# Altium PCB IR_Communication.PcbDoc
Units mil, origin at the board's own origin, x right, y up, seen from the top; angles counter-clockwise.
Board outline 4250 x 3275 mil, 2 copper layers (Top Layer, Bottom Layer); 58 components, 46 nets, 191 pads, 21 vias.
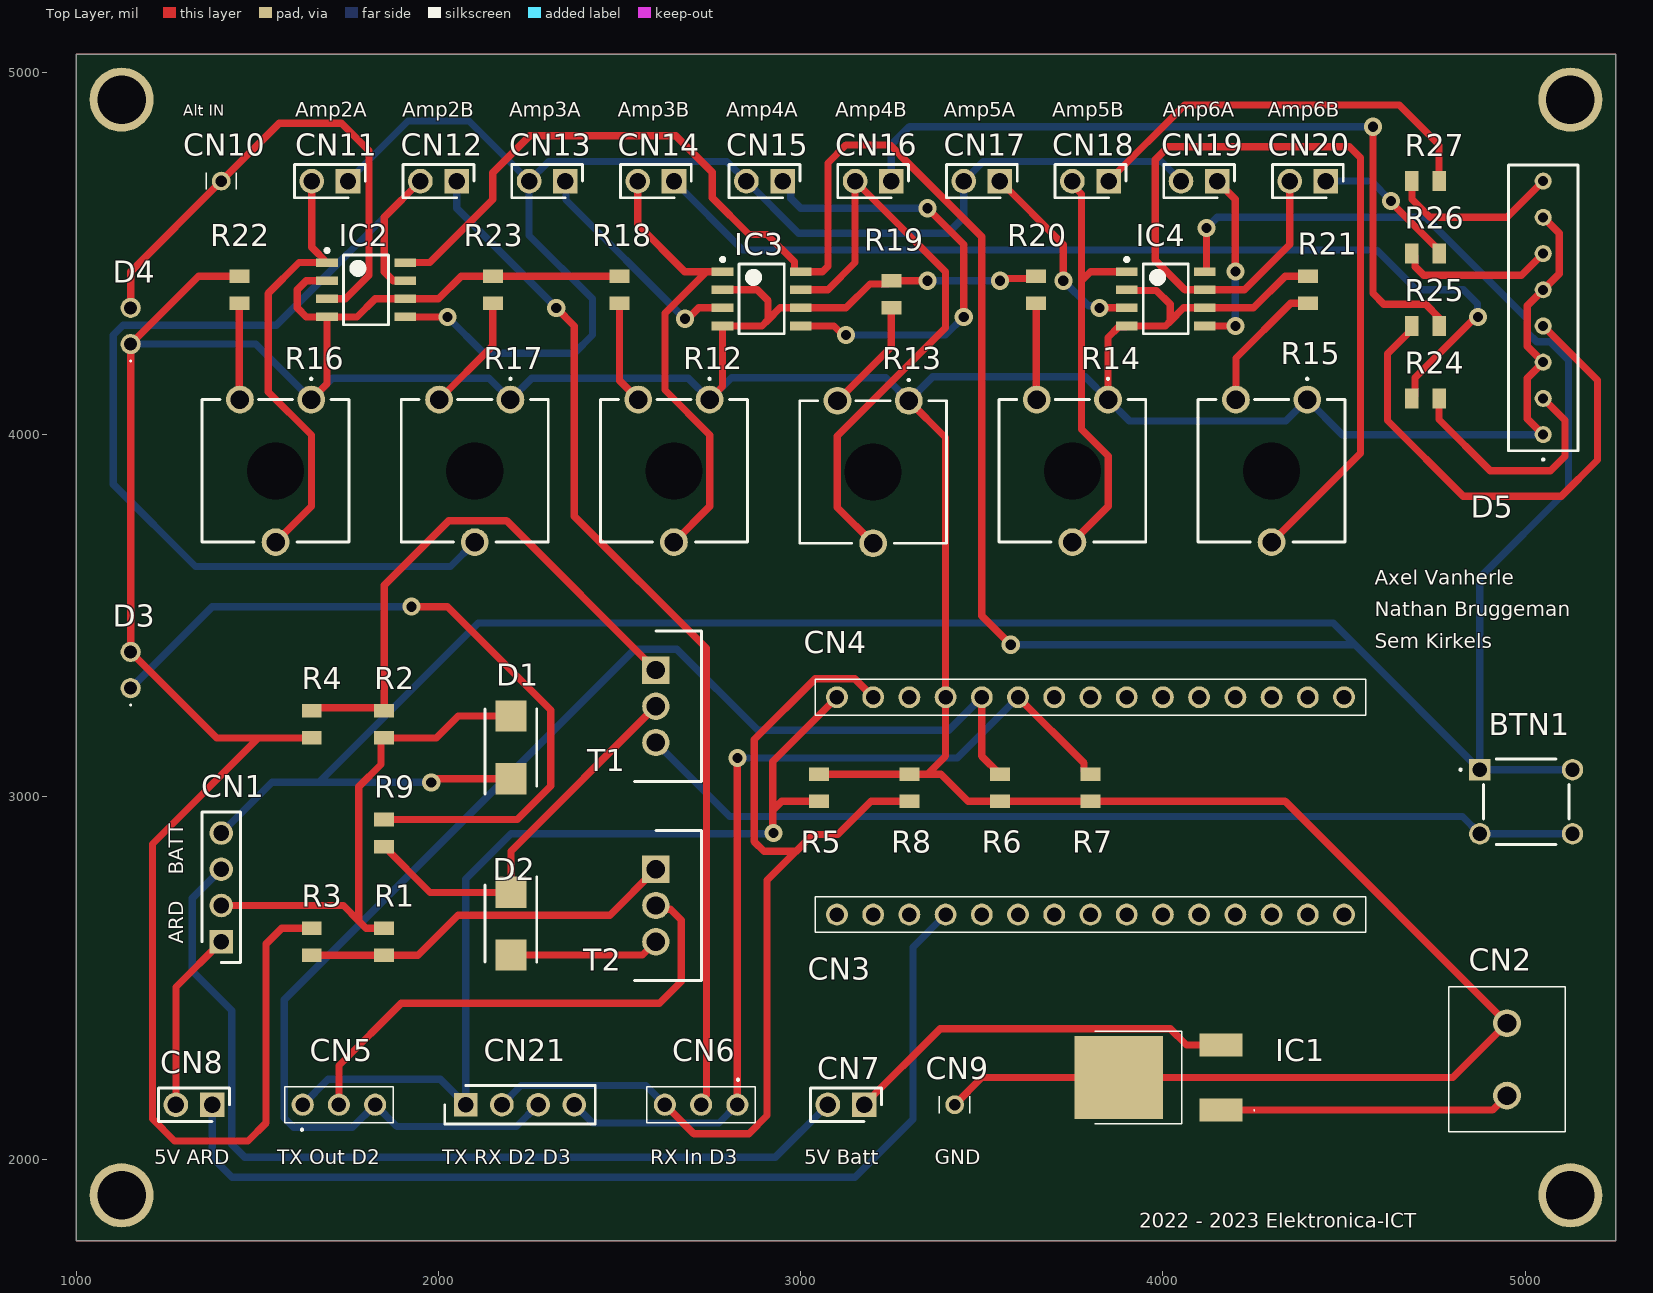
[diagram p0: Top Layer view]
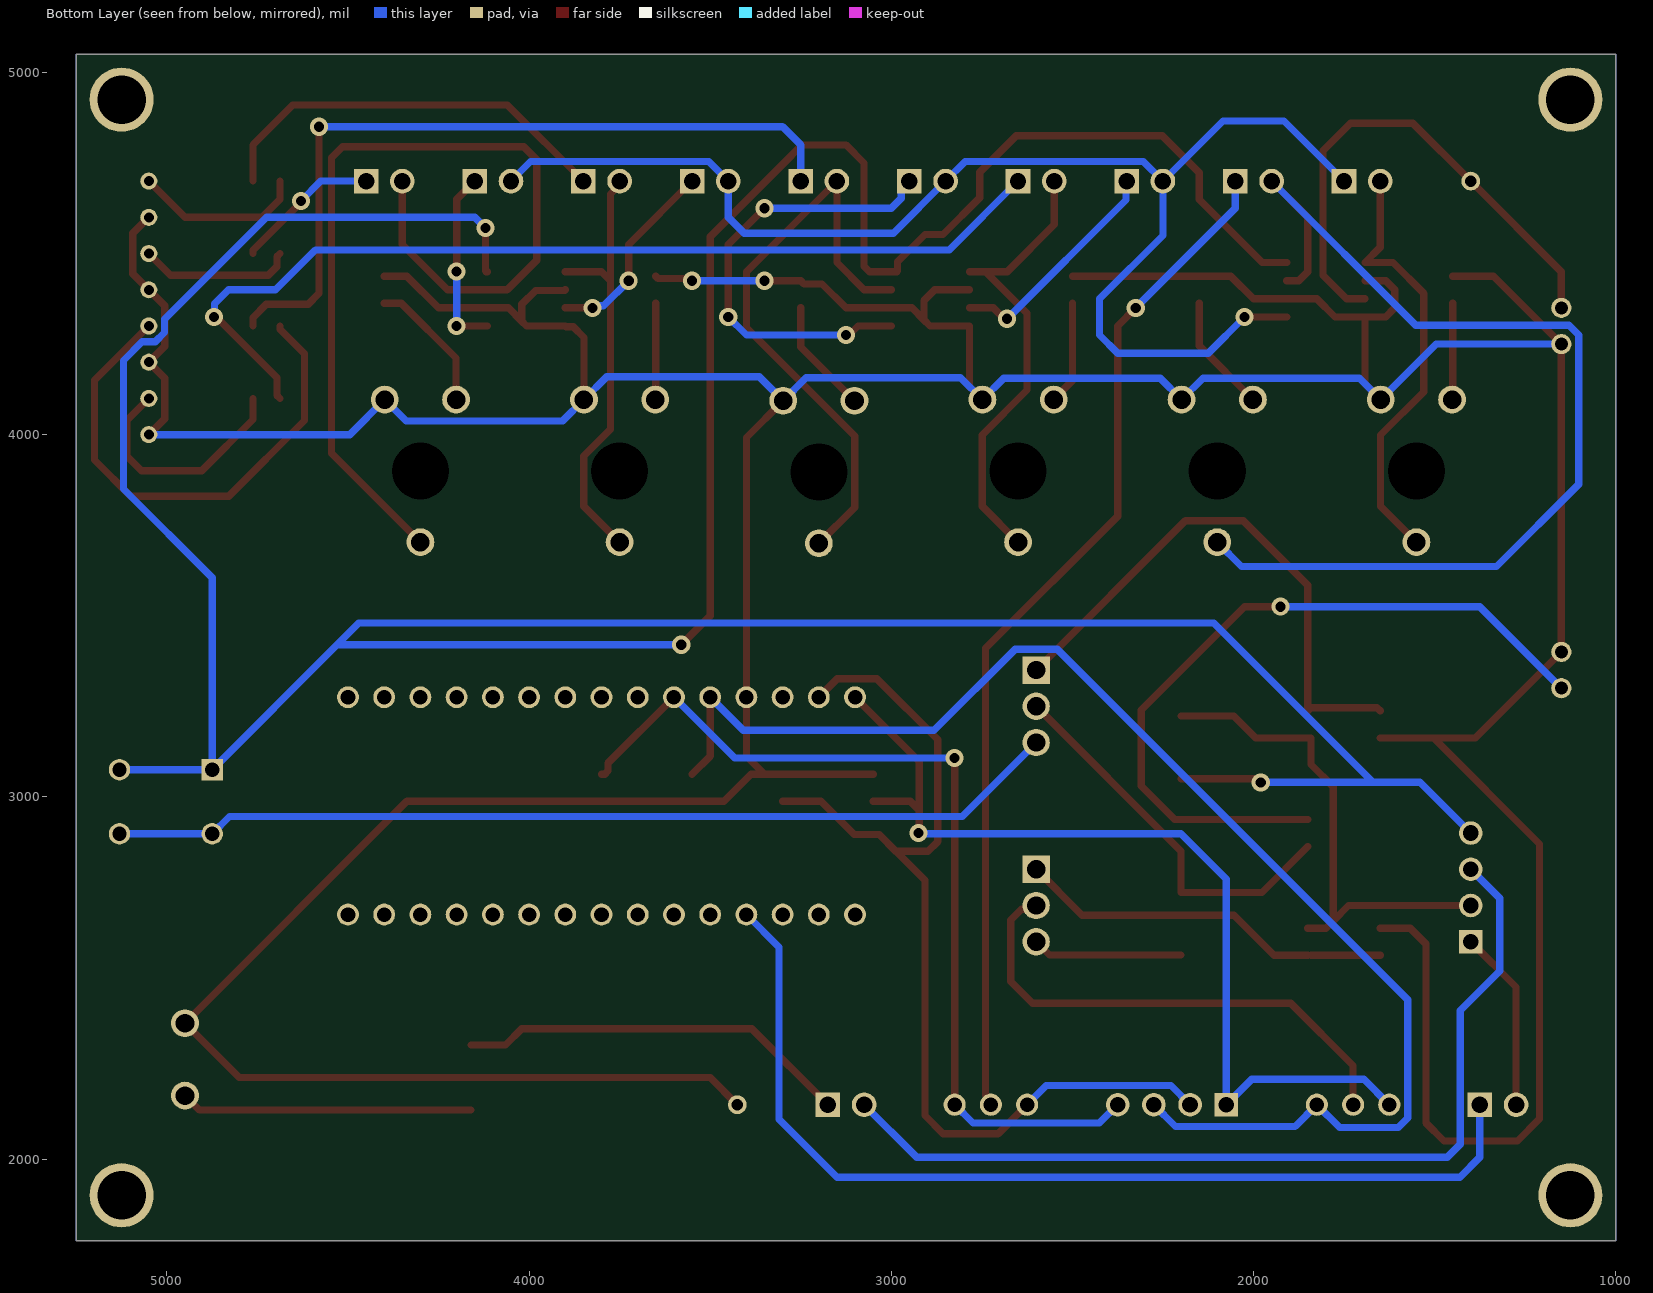
[diagram p1: Bottom Layer view, seen from below]
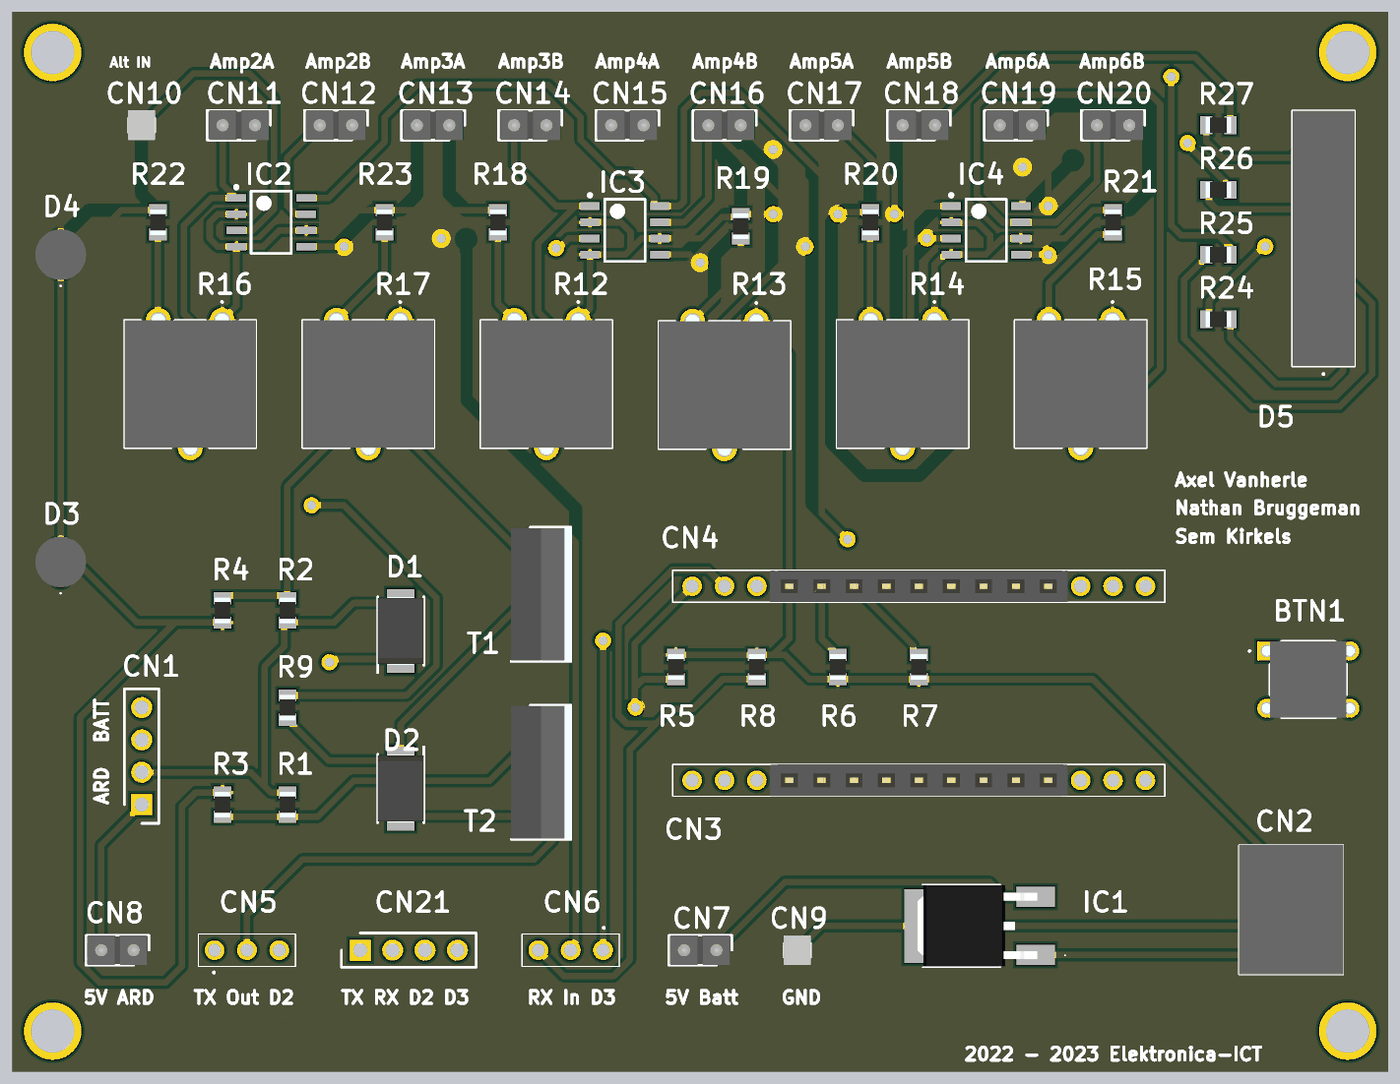
[diagram p2: 3D render of the assembled board from above, using the file's embedded part models]

## Layer stack, top to bottom
Top Solder: solder mask 0.4, Solder Resist, Dk 3.5
Top Layer: signal copper 1.4
Dielectric 1: dielectric 12.6, FR-4, Dk 4.8
Bottom Layer: signal copper 1.4
Bottom Solder: solder mask 0.4, Solder Resist, Dk 3.5

## Board outline
1000,1775 5250,1775 5250,5050 1000,5050

## Design rules (kind name [scope] priority, off if disabled: settings)
Clearance [All] p1: gap=10 ignorepadtopadclearanceinfootprint=FALSE except(0: Arc-Hole Track-Hole SMDPad-Hole THPad-Hole Via-Hole Fill-Hole Poly-Hole Region-Hole Text-Hole)
PolygonConnect [All] p1: connectstyle=Relief reliefconductorwidth=10 reliefentries=4 polygonreliefangle="90 Angle" airgapwidth=10
RoutingVias [All] p1: holewidth=28 width=50 viastyle="Through Hole" minholewidth=28 minwidth=50 maxholewidth=28 maxwidth=50
SolderMaskExpansion [All] p1: expansion=4 istentingtop=FALSE
Width [All] p1: maxlimit=30 minlimit=20 preferedwidth=20 minimp=50.000000 maximp=50.000000 favimp=50.000000
30 further rules are at their usual default settings.

## Classes and differential pairs
component class Pre_Amplifier: CN10 CN11 CN12 D4 IC2 R16 R17 R22 R23
component class Indicators: D5 R24 R25 R26 R27
component class Amplifier: CN13 CN14 CN15 CN16 CN17 CN18 CN19 CN20 IC3 IC4 R12 R13 R14 R15 R18 R19 R20 R21
component class Input_Selection: BTN1 CN1 D1 D2 D3 R1 R2 R3 R4 R9 T1 T2
component class CPU: CN2 CN3 CN4 CN5 CN6 CN7 CN8 CN9 CN21 IC1 R5 R6 R7 R8

## Components (designator, comment, footprint, x,y, rotation, side; value= is the part's Value field where it differs from the comment)
BTN1 "Button" PushButton 4875,3075 r0 top
CN1 "4 Pin Header" "4 PIN HEADER" 1400,2600 r90 top
CN2 "BAT SCREW CON" "BAT SCREW CON" 4950,2175 r90 top
CN3 "Arduino 15PIN" "15 Pin Header" 4500,2675 r180 top
CN4 "Arduino 15PIN" "15 Pin Header" 4500,3275 r180 top
CN5 "Jumper TX Arduino" "3 Pin Header" 1625,2150 r0 top
CN6 "Jumper RX Arduino" "3 Pin Header" 2825,2150 r180 top
CN7 "2 Pin Header" "2 Pin Header" 3175,2150 r180 top
CN8 "2 Pin Header" "2 Pin Header" 1375,2150 r180 top
CN9 "GND REF" "1 PIN HEADER" 3425,2150 r0 top
CN10 "1 Pin Header" "1 PIN HEADER" 1400,4700 r0 top
CN11 "2 Pin Header" "2 Pin Header" 1750,4700 r180 top
CN12 "2 Pin Header" "2 Pin Header" 2050,4700 r180 top
CN13 "2 Pin Header" "2 Pin Header" 2350,4700 r180 top
CN14 "2 Pin Header" "2 Pin Header" 2650,4700 r180 top
CN15 "2 Pin Header" "2 Pin Header" 2950,4700 r180 top
CN16 "2 Pin Header" "2 Pin Header" 3250,4700 r180 top
CN17 "2 Pin Header" "2 Pin Header" 3550,4700 r180 top
CN18 "2 Pin Header" "2 Pin Header" 3850,4700 r180 top
CN19 "2 Pin Header" "2 Pin Header" 4150,4700 r180 top
CN20 "2 Pin Header" "2 Pin Header" 4450,4700 r180 top
CN21 "ARD DATA REF" "4 PIN HEADER" 2075,2150 r0 top
D1 "Shottky Diode" "Zener Diode" 2200,3136.61 r90 top
D2 "Shottky Diode" "Zener Diode" 2200,2650 r270 top
D3 "IR LED" ELIR204H16L10 1150,3300 r90 top
D4 "IR LED" ELIR204H16L10 1150,4250 r90 top
D5 "LED Bar" LED_Bar 5050,4000 r90 top
IC1 "5V Regulator" "5V Regulator" 4000,2225 r0 top
IC2 "NCV833DR2G" "Footprint Opamp" 1800,4400 r0 top
IC3 "NCV833DR2G" "Footprint Opamp" 2892.13,4375 r0 top
IC4 "NCV833DR2G" "Footprint Opamp" 4007.87,4375 r0 top
R1 "1 kOhm" 0805 1850,2600 r270 top
R2 "1 kOhm" 0805 1850,3200 r90 top
R3 "100 kOhm" 0805 1650,2600 r90 top
R4 "100 kOhm" 0805 1650,3200 r270 top
R5 "100k Ohm" 0805 3050,3025 r270 top
R6 "100k Ohm" 0805 3550,3025 r90 top
R7 "100k Ohm" 0805 3800,3025 r270 top
R8 "100k Ohm" 0805 3300,3025 r90 top
R9 "220 Ohm" 0805 1850,2900 r90 top
R12 "PT10LV10-202A2020-S" "Variable resistor" 2748.43,4096.85 r180 top
R13 "PT10LV10-202A2020-S" "Variable resistor" 3298.43,4093.7 r180 top
R14 "PT10LV10-202A2020-S" "Variable resistor" 3848.43,4096.85 r180 top
R15 "PT10LV10-202A2020-S" "Variable resistor" 4398.43,4096.85 r180 top
R16 "PT10LV10-202A2020-S" "Variable resistor" 1648.43,4096.85 r180 top
R17 "PT10LV10-202A2020-S" "Variable resistor" 2198.43,4096.85 r180 top
R18 "1 kOhm" 0805 2500,4400 r90 top
R19 "1 kOhm" 0805 3250,4387.4 r90 top
R20 "1 kOhm" 0805 3650,4400 r90 top
R21 "1 kOhm" 0805 4400,4400 r90 top
R22 "1 kOhm" 0805 1450,4400 r90 top
R23 "1 kOhm" 0805 2150,4400 r90 top
R24 "220 Ohm" 0805 4725,4100 r0 top
R25 "220 Ohm" 0805 4725,4300 r180 top
R26 "220 Ohm" 0805 4725,4500 r180 top
R27 "220 Ohm" 0805 4725,4700 r180 top
T1 "P-Channel MOSFET" TO254P469X1042X1967-3P 2600,3350 r270 top
T2 "N-Channel MOSFET" N-MOS 2600,2800 r270 top

## Footprints (in the part's own frame and the unit in brackets; to place one, negate y for a bottom-side part, rotate by r counter-clockwise, add the part's x,y. Pads: shape width x height; smd on the part's side, far side on the other; paste and mask are expansions set on the pad)
"1 PIN HEADER" [mm]
  round 1.316 hole 0.81: 2(0,0)
  silkscreen extent -1.07,-0.59 1.07,0.59, body extent -1.07,-1.17 1.07,1.17, height 8.2
"2 Pin Header" [mm]
  rect 1.725x1.725 hole 1.15: 1(0,0)
  round 1.725 hole 1.15: 2(2.54,0)
  silkscreen extent -1.21,-1.17 3.75,1.17, body extent -1.06,-1.17 3.6,1.17, height 8.21
"3 Pin Header" [mm] "TSW-103-XX-YY-S"
  round 1.55 hole 1.02: 1(0,0) 2(2.54,0) 3(5.08,0)
  silkscreen extent -1.27,-1.8 6.35,1.27, body extent -2.54,-2.92 7.62,2.54, height 0.25
"4 PIN HEADER" [mm] "HDRV4W64P0X254_1X4_1016X250X863P"
  rect 1.65x1.65 hole 1.1: 1(0,0)
  round 1.65 hole 1.1: 2(2.54,0) 3(5.08,0) 4(7.62,0)
  silkscreen extent -1.47,-1.35 9.09,1.35, body extent -1.78,-1.65 9.27,1.65, height 0.25
"5V Regulator" [mm] "MC7805BDTG"
  rect 3x1.6 smd: 1(4.08,-2.285) 3(4.08,2.285)
  rect 6.2x5.8 smd: 2(-3.1,0)
  silkscreen extent -4.79,-3.25 6.43,3.25, body extent -5.18,-3.17 4.22,3.18, height 2.18
"15 Pin Header" [mm]
  round 1.53 hole 1.02: 1(0,0) 2(2.54,0) 3(5.08,0) 4(7.62,0) 5(10.16,0) 6(12.7,0) 7(15.24,0) 8(17.78,0) 9(20.32,0) 10(22.86,0) 11(25.4,0) 12(27.94,0) 13(30.48,0) 14(33.02,0) 15(35.56,0)
  silkscreen extent -1.52,-1.25 37.08,1.25, body extent 6.1,-1.25 29.46,1.25, height 9.61
0805 [mm]
  rect 0.95x1.4 smd: 1(-0.95,0) 2(0.95,0)
  body extent -1,-0.63 1,0.63, height 0.6
"BAT SCREW CON" [mm]
  round 1.95 hole 1.3: 1(0,0) 2(5.08,0)
  silkscreen extent -2.54,-4.1 7.62,4.1, body extent -2.54,-4.1 7.62,4.1, height 10.5
ELIR204H16L10 [mm]
  round 1.416 hole 0.91: 1(0,0) 2(2.54,0)
  silkscreen extent -1.23,-0.05 -1.13,0.05, body extent -0.73,-1.99 3.27,1.99, height 7.1
"Footprint Opamp" [mm] "ONSC-SOIC-8-751-07_V"
  rect 1.52x0.6 smd: 1(-2.74,1.905) 2(-2.74,0.635) 3(-2.74,-0.635) 4(-2.74,-1.905) 5(2.74,-1.905) 6(2.74,-0.635) 7(2.74,0.635) 8(2.74,1.905)
  silkscreen extent -2.86,-2.45 1.58,2.88, body extent -1.95,-2.45 1.95,2.45, height 1.75
LED_Bar [mm] "SSBLX2550SGW"
  round 1.2 hole 0.7: 1(0,0) 2(2.54,0) 3(5.08,0) 4(7.62,0) 5(10.16,0) 6(12.7,0) 7(15.24,0) 8(17.78,0)
  silkscreen extent -1.8,-2.43 18.91,2.43, body extent -1.13,-2.43 18.91,2.43, height 7.47
N-MOS [mm] "TO254P469X1042X1967-3P"
  rect 1.92x1.92 hole 1.28: 1(0,0)
  round 1.92 hole 1.28: 2(2.54,0) 3(5.08,0)
  silkscreen extent -2.73,-1.49 7.81,3.2, body extent -2.67,-1.5 7.75,3.19, height 18.84
PushButton [mm] "TS026650BK100SCRD"
  rect 1.5x1.5 hole 1: 1(0,0)
  round 1.5 hole 1: 2(6.5,0) 3(0,-4.5) 4(6.5,-4.5)
  silkscreen extent -1.4,-5.25 6.25,0.75, body extent -0.4,-5.25 6.9,0.75, height 5.3
TO254P469X1042X1967-3P [mm]
  rect 1.92x1.92 hole 1.28: 1(0,0)
  round 1.92 hole 1.28: 2(2.54,0) 3(5.08,0)
  silkscreen extent -2.73,-1.49 7.81,3.2, body extent -2.67,-1.5 7.75,3.19, height 18.84
"Variable resistor" [mm] "PT10LV10202A2020S"
  round 1.95 hole 1.3: A1(0,0) E1(5,0) S1(2.5,10)
  round 2 hole 4 unplated: MH1(2.5,5)
  silkscreen extent -2.65,-1.5 7.65,10, body extent -2.65,-0.55 7.65,10.55, height 6.3
"Zener Diode" [mm] "DIOM5436X244N"
  rect 2.2x2.15 smd: 1(-2.2,0) 2(2.2,0)
  silkscreen extent -3.27,-1.81 2.7,1.81, body extent -2.7,-1.81 2.7,1.81, height 2.44

## Part data
BTN1: "TS02-66-50-BK-100-SCR-D", Manufacturer_Name="CUI Devices", Mouser Part Number=179-TS026650BK100SCR, Arrow Part Number=TS02-66-50-BK-100-SCR-D, Arrow Price/Stock=https://www.arrow.com/en/products/ts02-66-50-bk-100-scr-d/cui-devices?region=nac, Datasheet Link=https://www.cuidevices.com/product/resource/ts02.pdf, Height=5.2mm, Manufacturer_Part_Number=TS02-66-50-BK-100-SCR-D, Mouser Price/Stock=https://www.mouser.co.uk/ProductDetail/CUI-Devices/TS02-66-50-BK-100-SCR-D?qs=A6eO%252BMLsxmQON%252BZSzpek2A%3D%3D
CN1: "G800LW304032EU", Manufacturer_Name="Amphenol Communications Solutions", Mouser Part Number=523-G800LW304032EU, Datasheet Link=https://cdn.amphenol-cs.com/media/wysiwyg/files/drawing/g800lwxxxxxxeu.pdf, Height=8.63mm, Manufacturer_Part_Number=G800LW304032EU, Mouser Price/Stock=https://www.mouser.com/Search/Refine.aspx?Keyword=523-G800LW304032EU
CN2: "Connector", Arrow Part Number=TB006-508-02BE, Manufacturer_Name="CUI Devices", Mouser Part Number=490-TB006-508-02BE, Arrow Price/Stock=https://www.arrow.com/en/products/tb006-508-02be/cui-devices?region=nac, Datasheet Link=https://datasheet.datasheetarchive.com/originals/distributors/Datasheets_SAMA/b266c411a02422edb513b788238f8420.pdf, Height=10.4mm, Manufacturer_Part_Number=TB006-508-02BE, Mouser Price/Stock=https://www.mouser.co.uk/ProductDetail/CUI-Devices/TB006-508-02BE?qs=vLWxofP3U2wEdOVV%2FaT04w%3D%3D
CN3 CN4: library part "15 Pin Header", "15 Pin Header Connector", Arrow Part Number=PRT-16279, Manufacturer_Name=SparkFun, Mouser Part Number=474-PRT-16279, Arrow Price/Stock=https://www.arrow.com/en/products/prt-16279/sparkfun-electronics?region=nac, Datasheet Link=https://cdn.sparkfun.com/assets/8/d/8/4/7/DS-16279-Arduino_Nano_Stackable_Header_Kit.pdf, Height=8.65mm, Manufacturer_Part_Number=PRT-16279, Mouser Price/Stock=https://www.mouser.co.uk/ProductDetail/SparkFun/PRT-16279?qs=vmHwEFxEFR8I6W1vfufYPg%3D%3D
CN5 CN6: library part "3 Pin Header", "TSW-103-07-G-S", Manufacturer_Name=SAMTEC, Mouser Part Number=200-TSW10307GS, Arrow Part Number=TSW-103-07-G-S, Arrow Price/Stock=https://www.arrow.com/en/products/tsw-103-07-g-s/samtec?region=europe, Datasheet Link=http://suddendocs.samtec.com/prints/tsw-xxx-xx-xxx-x-xx-xxx-mkt.pdf, Manufacturer_Part_Number=TSW-103-07-G-S, Mouser Price/Stock=https://www.mouser.co.uk/ProductDetail/Samtec/TSW-103-07-G-S?qs=iT52DjcXudtntd1jApTIAw%3D%3D
CN7 CN8 CN11 CN12 CN13 CN14 CN15 CN16 CN17 CN18 CN19 CN20: "Connector", Arrow Part Number=5-146284-2, Manufacturer_Name="TE Connectivity", Mouser Part Number=571-5-146284-2, Arrow Price/Stock=https://www.arrow.com/en/products/5-146284-2/te-connectivity, Datasheet Link=https://componentsearchengine.com/Datasheets/1/5-146284-2.pdf, Height=8.21mm, Manufacturer_Part_Number=5-146284-2, Mouser Price/Stock=https://www.mouser.co.uk/ProductDetail/TE-Connectivity/5-146284-2?qs=26tC0AmtfJgTF4M3cEQgiA%3D%3D
CN9: library part "1 Pin Header", "Connector", Arrow Part Number=5-146281-1, Manufacturer_Name="TE Connectivity", Mouser Part Number=571-5-146281-1, Arrow Price/Stock=https://www.arrow.com/en/products/5-146281-1/te-connectivity, Datasheet Link=https://www.mouser.com/datasheet/2/418/NG_CD_146281_G1-1238634.pdf, Height=8.81mm, Manufacturer_Part_Number=5-146281-1, Mouser Price/Stock=https://www.mouser.co.uk/ProductDetail/TE-Connectivity/5-146281-1?qs=bwpFY26eRVdQbbdvDiYEig%3D%3D
CN10: "Connector", Arrow Part Number=5-146281-1, Manufacturer_Name="TE Connectivity", Mouser Part Number=571-5-146281-1, Arrow Price/Stock=https://www.arrow.com/en/products/5-146281-1/te-connectivity, Datasheet Link=https://www.mouser.com/datasheet/2/418/NG_CD_146281_G1-1238634.pdf, Height=8.81mm, Manufacturer_Part_Number=5-146281-1, Mouser Price/Stock=https://www.mouser.co.uk/ProductDetail/TE-Connectivity/5-146281-1?qs=bwpFY26eRVdQbbdvDiYEig%3D%3D
CN21: library part "4 Pin Header", "G800LW304032EU", Manufacturer_Name="Amphenol Communications Solutions", Mouser Part Number=523-G800LW304032EU, Datasheet Link=https://cdn.amphenol-cs.com/media/wysiwyg/files/drawing/g800lwxxxxxxeu.pdf, Height=8.63mm, Manufacturer_Part_Number=G800LW304032EU, Mouser Price/Stock=https://www.mouser.com/Search/Refine.aspx?Keyword=523-G800LW304032EU
D1 D2: library part "Zener Diode", "VS-10BQ015-M3_5BT", Arrow Part Number=VS-10BQ015-M3/5BT, Manufacturer_Name=Vishay, Mouser Part Number=78-VS-10BQ015-M35BT, Arrow Price/Stock=https://www.arrow.com/en/products/vs-10bq015-m35bt/vishay, Datasheet Link=https://componentsearchengine.com/Datasheets/2/VS-10BQ015-M3_5BT.pdf, Height=2.44mm, Manufacturer_Part_Number=VS-10BQ015-M3/5BT, Mouser Price/Stock=https://www.mouser.co.uk/ProductDetail/Vishay-Semiconductors/VS-10BQ015-M3-5BT?qs=asPD7ZL2j3VpzaHhlDLLKA%3D%3D
D3 D4: "LED EL-IR204_H16_L10", Manufacturer_Name=Everlight, Manufacturer_Part_Number=EL-IR204/H16/L10, Mouser Part Number=638-IR204/H16/L10, Datasheet Link=https://www.mouser.de/ProductDetail/Everlight/EL-IR204-H16-L10?qs=vs%252BWWTB4QKYLfZ6uf%2Fu%252B0Q%3D%3D, Height=7mm, Mouser Price/Stock=https://www.mouser.co.uk/ProductDetail/Everlight/EL-IR204-H16-L10?qs=vs%252BWWTB4QKYLfZ6uf%2Fu%252B0Q%3D%3D
D5: "SSB-LX2550SGW", Manufacturer_Name=Lumex, Mouser Part Number=696-SSB-LX2550SGW, Datasheet Link=https://www.mouser.fr/datasheet/2/244/SSB-LX2550SGW-1777056.pdf, Height=7.37mm, Manufacturer_Part_Number=SSB-LX2550SGW, Mouser Price/Stock=https://www.mouser.co.uk/ProductDetail/Lumex/SSB-LX2550SGW?qs=K%252Bxkc0srH7Bp%252B5yK7Wnd0w%3D%3D
IC1: "MC7805BDTG", Manufacturer_Name=onsemi, Mouser Part Number=863-MC7805BDTG, Arrow Part Number=MC7805BDTG, Arrow Price/Stock=https://www.arrow.com/en/products/mc7805bdtg/on-semiconductor?region=europe, Datasheet Link=https://www.onsemi.com/pub/Collateral/MC7800-D.PDF, Height=2.38mm, Manufacturer_Part_Number=MC7805BDTG, Mouser Price/Stock=https://www.mouser.co.uk/ProductDetail/onsemi/MC7805BDTG?qs=%252B9%2Fcbd0IE0TYE8BQQ8My5g%3D%3D
IC2 IC3 IC4: library part Opamp, "Low Noise, Audio Dual Operational Amplifier, -40 to 85 degC, 8-Pin SOIC, Pb-Free, Tape and Reel", Manufacturer="On Semiconductor", ComponentLink1Description="Manufacturer URL", ComponentLink1URL=http://www.onsemi.com/, ComponentLink2Description=Datasheet, ComponentLink2URL=http://www.onsemi.cn/pub_link/Collateral/LM833-D.PDF, ComponentLink3Description="Package Specification", ComponentLink3URL=http://www.onsemi.com/pub_link/Collateral/751-07.PDF, DatasheetVersion="Rev. 6", GBW Typ (MHz)=15, Mounting Technology="Surface Mount", PackageDescription="8-Pin Small Outline Integrated Circuit, Body 4.9 x 3.9 mm, Pitch 1.27 mm", PackageReference=SOIC-8-751-07, PackageVersion="Rev. AK, 02/2011", Packing="Tape and Reel", PartNumber=NCV833DR2G, RoHS=TRUE, SR Typ (V/uS)=7
R1 R2 R3 R4 R5 R6 R7 R8 R9 R18 R19 R20 R21 R22 R23 R24 R25 R26 R27: library part Resistor, "Resistor", Manufacturer_Name=YAGEO, Manufacturer_Part_Number=RP0805BRD071KL, Mouser Part Number=603-RP0805BRD071KL, Datasheet Link=https://www.yageo.com/upload/media/product/products/datasheet/rchip/PYu-RP_51_RoHS_L_0.pdf, Height=0.6mm, Mouser Price/Stock=https://www.mouser.co.uk/ProductDetail/YAGEO/RP0805BRD071KL?qs=Y0Uzf4wQF3m8mAbG54g63Q%3D%3D
R12 R13 R14 R15 R16 R17: "Variable Resistor", Manufacturer_Name=PIHER, Mouser Part Number=531-PT10V-2K-S, Datasheet Link=https://www.piher.net/pdf/12-PT10v03.pdf, Height=6.2mm, Manufacturer_Part_Number=PT10LV10-202A2020-S, Mouser Price/Stock=https://www.mouser.co.uk/ProductDetail/Amphenol-Piher/PT10LV10-202A2020-S?qs=pCZPOPZMYPhb8H8I5oW3PQ%3D%3D
T1: "MOSFET (P-Channel)IRF9530NPBF", Arrow Part Number=IRF9530NPBF, Manufacturer_Name=Infineon, Mouser Part Number=942-IRF9530NPBF, Arrow Price/Stock=https://www.arrow.com/en/products/irf9530npbf/infineon-technologies-ag?region=europe, Datasheet Link=https://www.infineon.com/dgdl/irf9530npbf.pdf?fileId=5546d462533600a401535611b9931dc1, Height=4.69mm, Manufacturer_Part_Number=IRF9530NPBF, Mouser Price/Stock=https://www.mouser.co.uk/ProductDetail/Infineon-Technologies/IRF9530NPBF?qs=9%252BKlkBgLFf2oWmEcBf5aZQ%3D%3D
T2: "MOSFET (N-Channel)IRF540NPBF", Arrow Part Number=IRF540NPBF, Manufacturer_Name=Infineon, Mouser Part Number=942-IRF540NPBF, Arrow Price/Stock=https://www.arrow.com/en/products/irf540npbf/infineon-technologies-ag?region=europe, Datasheet Link=https://www.infineon.com/dgdl/irf540n.pdf?fileId=5546d462533600a4015355e396cb199f, Height=4.69mm, Manufacturer_Part_Number=IRF540NPBF, Mouser Price/Stock=https://www.mouser.co.uk/ProductDetail/Infineon-Technologies/IRF540NPBF?qs=9%252BKlkBgLFf36us%252Bg5kwffA%3D%3D

## Free pads (board coordinates)
  round 177.17 hole 133.86: M3(1125,1900) M3(1125,4925) M3(5125,1900) M3(5125,4925)

## Via types
v1: diameter 50, hole 28, Top Layer to Bottom Layer, 21 vias

## Nets (pads, with @x,y where several pads share a name; then routed paths per layer and width w, separated by ;. In a path a pad name is that pad's centre, name@x,y a point inside that pad or via, vN(x,y) a via of type N, cw(c..) or ccw(c..) an arc to the next point about the centre after c; other vN are vias at no path point)
GND: CN2.2 CN4.12 CN9.2 D3.2 D4.1 D5.1 D5.3 D5.5 D5.7 IC1.2 IC2.2 IC2.4 IC2.6 IC3.2 IC3.4 IC3.6 IC4.2 IC4.4 IC4.6 R3.2 R4.2 R5.1 R6.1 R7.2 R8.2 R12.A1 R13.A1 R14.A1 R15.A1 R16.A1 R17.A1 R18.2 R19.2 R20.2 R21.2 R22.2 R23.2 | length 17502.6
  Top Layer w20: R22.2 1337.4,4437.4 D4.1 D3.2 1387.4,3162.6 1502.6,3162.6 ; R16.A1 1692.13,4140.55 IC2.4 ; R3.2 1567,2637.4 1524,2594.4 1524,2100 1474,2050 1271,2050 1210,2111 1210,2870 1502.6,3162.6 ; R4.2 1502.6,3162.6 ; IC2.2 1635,4425 1610,4400 1610,4350 1635,4325 IC2.4 ; R18.2 R23.2 2062.4,4437.4 2000,4375 IC2.6 1825,4375 1775,4325 IC2.4 ; R12.A1 2784.25,4132.68 IC3.4 2893,4300 2910,4317 ; IC3.2 2880,4400 2910,4370 2910,4317 ; R5.1 R8.2 3350,3062.4 ; R13.A1 3400,3992.13 CN4.12 3400,3112.4 3350,3062.4 ; v1(3350,4425) 3349.9,4424.9 3250.1,4424.9 R19.2 3241.3,4416.1 3191.1,4416.1 3125,4350 IC3.6 2943,4350 2910,4317 ; CN9.2 3500,2225 IC1.2 4800,2225 CN2.2 4337.4,2987.6 R7.2 R6.1 3461.8,2987.6 3387,3062.4 3350,3062.4 ; v1(3550,4425) 3555.74,4430.74 3643.34,4430.74 R20.2 ; R14.A1 3848.43,4268.43 3878.19,4298.19 3898.19,4298.19 IC4.4 4007,4300 4020,4313 ; IC4.2 3901.81,4398.19 3981.81,4398.19 4020,4360 4020,4313 ; R21.2 4337.4,4437.4 4250,4350 IC4.6 4057,4350 4020,4313 ; D5.1 5006,4044 5006,4156 D5.3 5006,4244 5006,4356 D5.5 5094,4444 5094,4556 D5.7
  Bottom Layer w20: D4.1 1495.28,4250 R16.A1 1707.58,4156 2139.28,4156 R17.A1 2257.58,4156 2689.28,4156 R12.A1 2808.58,4157 3235.13,4157 R13.A1 3364.73,4160 3785.28,4160 R14.A1 3907.28,4038 4339.58,4038 R15.A1 4495.28,4000 D5.1 ; v1(3350,4425) v1(3550,4425)
NetBTN1_3: BTN1.3 BTN1.4 T1.3 | length 2635.4
  Bottom Layer w20: T1.3 2804.26,2945.74 4827.09,2945.74 BTN1.3 BTN1.4
NetCN1_1: CN1.1 CN8.2 | length 501.8
  Top Layer w20: CN8.2 1275,2475 CN1.1
NetCN1_2: CN1.2 D1.2 R1.1 R2.1 | length 1390.5
  Top Layer w20: CN1.2 1737.4,2700 1780,2657.4 ; R1.1 1800,2637.4 1780,2657.4 ; D1.2 2054.63,3223.23 1994,3162.6 R2.1 1841,3162.6 1841,3089 1780,3028 1780,2657.4
NetCN1_3: CN1.3 CN7.2 | length 2558.3
  Bottom Layer w20: CN1.3 1320,2720 1320,2519 1429,2410 1429,2041 1465,2005 2930,2005 CN7.2
NetCN2_1: CN2.1 IC1.1 | length 805.9
  Top Layer w20: IC1.1 4910.04,2135.04 CN2.1
NetCN3_12: CN3.12 CN8.1 | length 2771.3
  Bottom Layer w20: CN8.1 1375,2005 1430,1950 3150,1950 3310,2110 3310,2585 CN3.12
NetCN4_10: CN4.10 CN6.1 CN21.4 R7.1 | length 2594.1
  Top Layer w20: CN6.1 v1(2825,3107) ; CN4.10 3782.44,3092.56 3782.44,3071.1 3791.14,3062.4 R7.1
  Bottom Layer w20: CN21.4 2425.51,2099.49 2774.49,2099.49 CN6.1 ; v1(2825,3107) 3432,3107 CN4.10
NetCN4_11: CN4.11 CN5.3 CN21.3 R6.2 | length 3805
  Top Layer w20: CN4.11 3500,3112.4 R6.2
  Bottom Layer w20: CN21.3 2215,2090 1885,2090 CN5.3 1762,2087 1600,2087 1574,2113 1574,2439.8 2542,3407.8 2658,3407.8 2881.8,3184 3409,3184 CN4.11
NetCN4_14: CN4.14 CN6.3 CN21.2 R8.1 | length 2854.2
  Top Layer w20: CN6.3 2705,2070 2857,2070 2907,2120 2907,2769.6 3033.3,2895.9 ; CN4.14 3149,3326 3040,3326 2872,3158 2872,2876.36 2898.36,2850 2987.4,2850 3033.3,2895.9 ; R8.1 3194,2987.6 3102.3,2895.9 3033.3,2895.9
  Bottom Layer w20: CN21.2 2228,2203 2572,2203 CN6.3
NetCN4_15: CN4.15 CN5.1 CN21.1 R5.2 | length 2620.5
  Top Layer w20: v1(2925,2900) 2922.74,2902.26 2922.74,2962.74 ; R5.2 2947.6,2987.6 2922.74,2962.74 ; CN4.15 2922.74,3097.74 2922.74,2962.74
  Bottom Layer w20: CN5.1 1695,2220 2005,2220 CN21.1 2075,2773 2200,2898 2923,2898 v1(2925,2900)
NetCN5_2: CN5.2 T2.2 | length 1405.7
  Top Layer w20: CN5.2 1725,2258.14 1896.86,2430 2610,2430 2670,2490 2670,2660 2640.64,2689.36 2610.64,2689.36 T2.2
NetCN6_2: CN6.2 CN12.1 | length 2842
  Top Layer w20: v1(2325,4350) 2375,4300 2375,3775 2740,3410 2740,2176.1 2725,2161.1 CN6.2
  Bottom Layer w20: CN12.1 2050,4625 v1(2325,4350)
NetCN7_1: CN7.1 IC1.3 | length 1091.3
  Top Layer w20: CN7.1 3385,2360 4020,2360 4065.04,2314.96 IC1.3
NetCN10_2: CN10.2 D4.2 IC2.3 | length 1446.1
  Top Layer w20: D4.2 1150,4450 CN10.2 1560,4860 1732,4860 1808,4784 1808,4440 1743,4375 IC2.3
NetCN11_1: CN11.1 CN13.2 CN15.2 CN17.2 CN19.2 IC2.5 | length 3781.6
  Top Layer w20: IC2.5 v1(2025,4325)
  Bottom Layer w20: CN11.1 1916,4866 2084,4866 CN13.2 ; v1(2025,4325) 2125,4225 2375,4225 2425,4275 2425,4375 2250,4550 CN13.2 ; CN19.2 3996,4754 3504,4754 CN17.2 3450,4600 3406.04,4556.04 2993.96,4556.04 CN15.2 2796,4754 2304,4754 CN13.2
NetCN11_2: CN11.2 IC2.1 R16.S1 | length 1216.9
  Top Layer w20: R16.S1 1649,3802.15 1649,3999 1530,4118 1530,4390 1615,4475 IC2.1 1650,4517.13 CN11.2
NetCN12_2: CN12.2 IC2.7 R17.S1 | length 2915.5
  Top Layer w20: IC2.7 1875,4425 1850,4450 1850,4600 CN12.2
  Bottom Layer w20: CN12.2 1552,4302 1129,4302 1102,4275 1102,3863 1329,3636 2032.85,3636 R17.S1
NetCN13_1: CN13.1 IC3.3 | length 633.4
  Top Layer w20: v1(2680,4320) 2688.12,4320 2718.12,4350 IC3.3
  Bottom Layer w20: CN13.1 2352.24,4697.76 2352.24,4647.76 v1(2680,4320)
NetCN14_1: CN14.1 R24.1 | length 2700.1
  Top Layer w20: R24.1 4696.3,4108.7 4696.3,4157.56 4863.74,4325 v1(4870,4325)
  Bottom Layer w20: CN14.1 2840,4510 4590,4510 4700,4400 4830,4400 4868.61,4361.39 4868.61,4326.39 v1(4870,4325)
NetCN14_2: CN14.2 IC3.1 R12.S1 | length 1295
  Top Layer w20: CN14.2 2550,4580 2680,4450 2740,4450 ; R12.S1 2749,3802.15 2749,3999 2625,4123 2625,4335 2740,4450 ; IC3.1 2740,4450
NetCN15_1: CN15.1 IC3.5 | length 1268.2
  Top Layer w20: IC3.5 3091.88,4300 3116.88,4275 v1(3125,4275) ; v1(3350,4625) 3450,4525 v1(3450,4325)
  Bottom Layer w20: CN15.1 2972.67,4677.33 2972.67,4652.33 3000,4625 v1(3350,4625) ; v1(3125,4275) 3400,4275 v1(3450,4325)
NetCN16_1: CN16.1 R25.1 | length 2143.9
  Top Layer w20: v1(4580,4850) 4580,4390 4610,4360 4725.4,4360 4762.4,4323 R25.1
  Bottom Layer w20: CN16.1 3250,4800 3300,4850 v1(4580,4850)
NetCN16_2: CN16.2 IC3.7 R13.S1 | length 1674.5
  Top Layer w20: IC3.7 3075,4400 3150,4475 CN16.2 3400,4450 3400,4295 3101,3996 3101,3799 R13.S1
NetCN17_1: CN17.1 IC4.3 | length 553.6
  Top Layer w20: CN17.1 3725,4525 v1(3725,4425) ; v1(3825,4350) IC4.3
  Bottom Layer w20: v1(3725,4425) 3794.26,4355.74 3819.26,4355.74 v1(3825,4350)
NetCN18_1: CN18.1 R27.1 | length 1145
  Top Layer w20: CN18.1 4060,4910 4652.4,4910 4762.4,4800 R27.1
NetCN18_2: CN18.2 IC4.1 R14.S1 | length 1214.2
  Top Layer w20: R14.S1 3849,3802.15 3849,3941 3775,4015 3775,4425 ; CN18.2 3750,4689.33 3775,4664.33 3775,4425 ; IC4.1 3800,4450 3775,4425
NetCN19_1: CN19.1 IC4.5 | length 505
  Top Layer w20: IC4.5 v1(4200,4300) ; CN19.1 4200,4650 v1(4200,4450)
  Bottom Layer w20: v1(4200,4300) v1(4200,4450)
NetCN20_1: CN20.1 R26.1 | length 402.6
  Top Layer w20: v1(4630,4645) 4630,4641.26 4762.4,4508.86 R26.1
  Bottom Layer w20: CN20.1 4575,4700 v1(4630,4645)
NetCN20_2: CN20.2 IC4.7 R15.S1 | length 2666.3
  Top Layer w20: R15.S1 4545.74,3948.89 4545.74,4764.26 4515,4795 4015,4795 3979,4759 3979,4481.62 4060.62,4400 IC4.7 4225,4400 4350,4525 CN20.2
NetD2_1: D2.1 R9.1 T1.2 | length 1082.1
  Top Layer w20: R9.1 1976.6,2736 2200,2736 D2.1 2200,2850 T1.2
NetD2_2: D2.2 T2.3 | length 415.2
  Top Layer w20: D2.2 2563.39,2563.39 T2.3
NetD3_1: D3.1 R9.2 | length 2079.6
  Top Layer w20: R9.2 2217.4,2937.4 2310,3030 2310,3240 2025,3525 v1(1925,3525)
  Bottom Layer w20: D3.1 1375,3525 v1(1925,3525)
NetD5_2: D5.2 R24.2 | length 666.1
  Top Layer w20: R24.2 4762.4,4041.6 4904,3900 5070,3900 5110,3940 5110,4040 D5.2
NetD5_4: D5.4 R25.2 | length 1429.1
  Top Layer w20: R25.2 4687.6,4291.14 4620,4223.54 4620,4039 4829,3830 5100,3830 5200,3930 5200,4150 D5.4
NetD5_6: D5.6 R26.2 | length 428.3
  Top Layer w20: R26.2 4696.3,4491.3 4696.3,4463.7 4720,4440 4990,4440 D5.6
NetD5_8: D5.8 R27.2 | length 474.5
  Top Layer w20: R27.2 4687.6,4650 4737.6,4600 4950,4600 D5.8
NetR1_2: R1.2 R3.1 T2.1 | length 1039.5
  Top Layer w20: R3.1 R1.2@1841.14,2562.6 ; R1.2 1943.29,2562.6 2054,2673.31 2473.31,2673.31 T2.1
NetR2_2: R2.2 R4.1 T1.1 | length 1548.2
  Top Layer w20: R4.1 1658.7,3246.1 1841.3,3246.1 R2.2 1850,3584 2028,3762 2188,3762 T1.1
NetR12_E1: R12.E1 R18.1 | length 287.1
  Top Layer w20: R18.1 2500,4148.42 R12.E1
NetR13_E1: R13.E1 R19.1 | length 317.8
  Top Layer w20: R13.E1 3250,4242.13 R19.1
NetR14_E1: R14.E1 R20.1 | length 266.4
  Top Layer w20: R20.1 3650,4098.42 R14.E1
NetR15_E1: R15.E1 R21.1 | length 375.7
  Top Layer w20: R15.E1 4201.57,4211.57 4352.6,4362.6 R21.1
NetR16_E1: R16.E1 R22.1 | length 266.4
  Top Layer w20: R22.1 1450,4098.42 R16.E1
NetR17_E1: R17.E1 R23.1 | length 327.2
  Top Layer w20: R17.E1 2150,4245.28 R23.1
VCC: BTN1.1 BTN1.2 CN1.4 D1.1 IC2.8 IC3.8 IC4.8 | length 11743.4
  Top Layer w20: IC2.8 1976,4475 2150,4649 2150,4723 2252,4825 2655,4825 2755.66,4724.34 2755.66,4654.34 2857.22,4552.78 2907.14,4552.78 2982.88,4477.04 2982.88,4451.81 2984.69,4450 IC3.8 3059.92,4450 3075,4465.08 3075,4750 3125,4800 3246.2,4800 3302.15,4744.05 3500,4546.2 3500,3500 v1(3580,3420) ; v1(1980,3040) 1988.12,3040 1998.12,3050 D1.1 ; IC4.8 4118.56,4450 4120.37,4451.81 v1(4120.37,4570.37)
  Bottom Layer w20: CN1.4 1540,3040 1670,3040 ; v1(1980,3040) 1670,3040 ; v1(3580,3420) 4530,3420 ; v1(4120.37,4570.37) 4150,4600 4725,4600 5006.38,4318.62 5006.38,4281.93 5031.93,4256.38 5068.62,4256.38 5120,4205 5120,3850 4875,3605 BTN1.1 ; BTN1.2 BTN1.1 ; 1670,3040 2110,3480 4470,3480 4530,3420 ; 4530,3420 BTN1.1
pads on no net: CN3.1 CN3.2 CN3.3 CN3.4 CN3.5 CN3.6 CN3.7 CN3.8 CN3.9 CN3.10 CN3.11 CN3.13 CN3.14 CN3.15 CN4.1 CN4.2 CN4.3 CN4.4 CN4.5 CN4.6 CN4.7 CN4.8 CN4.9 CN4.13 R12.MH1 R13.MH1 R14.MH1 R15.MH1 R16.MH1 R17.MH1

## Polygon pours and split planes (outlines as drawn)
GND on Bottom Layer "NONET_L02_P001" (solid, shelved, pour order 1): 1000,5050 1000,1775 5250,1775 5250,5050
GND on Top Layer "NONET_L01_P000" (solid, shelved, pour order 0): 1000,5050 1000,1775 5250,1775 5250,5050

## Silkscreen, mask and mechanical layers (free items; w line width, h text height)
Top Overlay:
  text "Alt IN" at 1295,4880 h30
  text "Amp2A" at 1605,4878.33 h40
  text "Amp2B" at 1900,4878.33 h40
  text "Amp3A" at 2195,4878.33 h40
  text "Amp3B" at 2495,4878.33 h40
  text "Amp4A" at 2795,4878.33 h40
  text "Amp4B" at 3095,4878.33 h40
  text "Amp5A" at 3395,4878.33 h40
  text "Amp5B" at 3695,4878.33 h40
  text "Amp6A" at 4000,4878.33 h40
  text "Amp6B" at 4290,4878.33 h40
  text "Axel Vanherle" at 4585,3585 h40
  text "Nathan Bruggeman" at 4585,3498.33 h40
  text "Sem Kirkels" at 4585,3410 h40
  text "BATT" at 1295,2785 h40 r90
  text "ARD" at 1295,2595 h40 r90
  text "5V ARD" at 1215,1985 h40
  text "TX Out D2" at 1555,1985 h40
  text "TX RX D2 D3" at 2010,1985 h40
  text "RX In D3" at 2585,1985 h40
  text "5V Batt" at 3010,1985 h40
  text "GND" at 3370,1985 h40
  text "2022 - 2023 Elektronica-ICT" at 3935,1810 h40